# Altium PCB PCB_ADC.PcbDoc
Units mm, origin at the board's own origin, x right, y up, seen from the top; angles counter-clockwise.
Board outline 50.55 x 47.88 mm, 2 copper layers (Top Layer, Bottom Layer); 20 components, 14 nets, 52 pads, 8 vias.
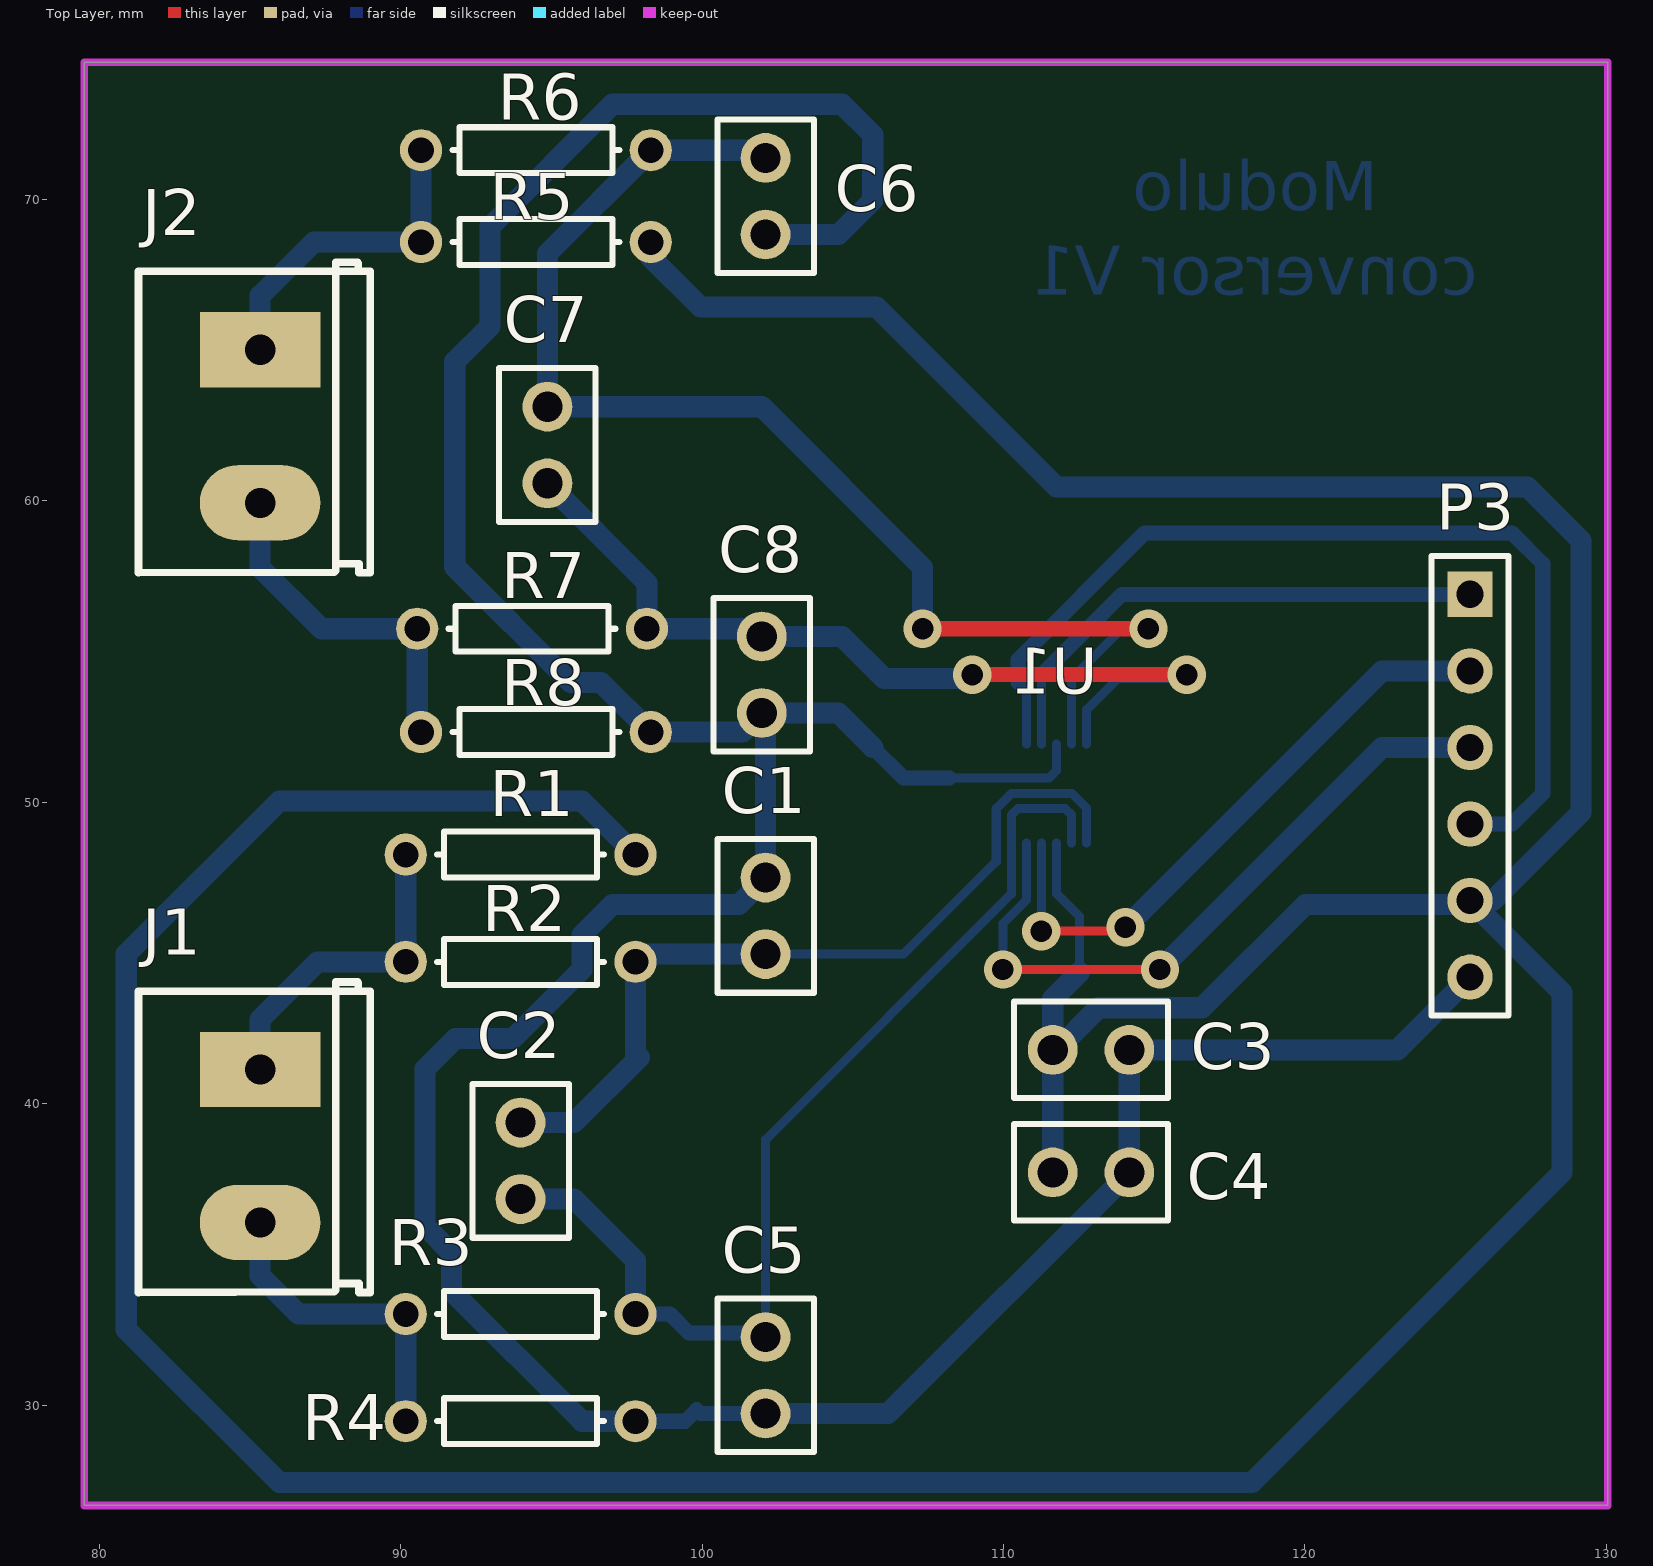
[diagram p0: Top Layer view]
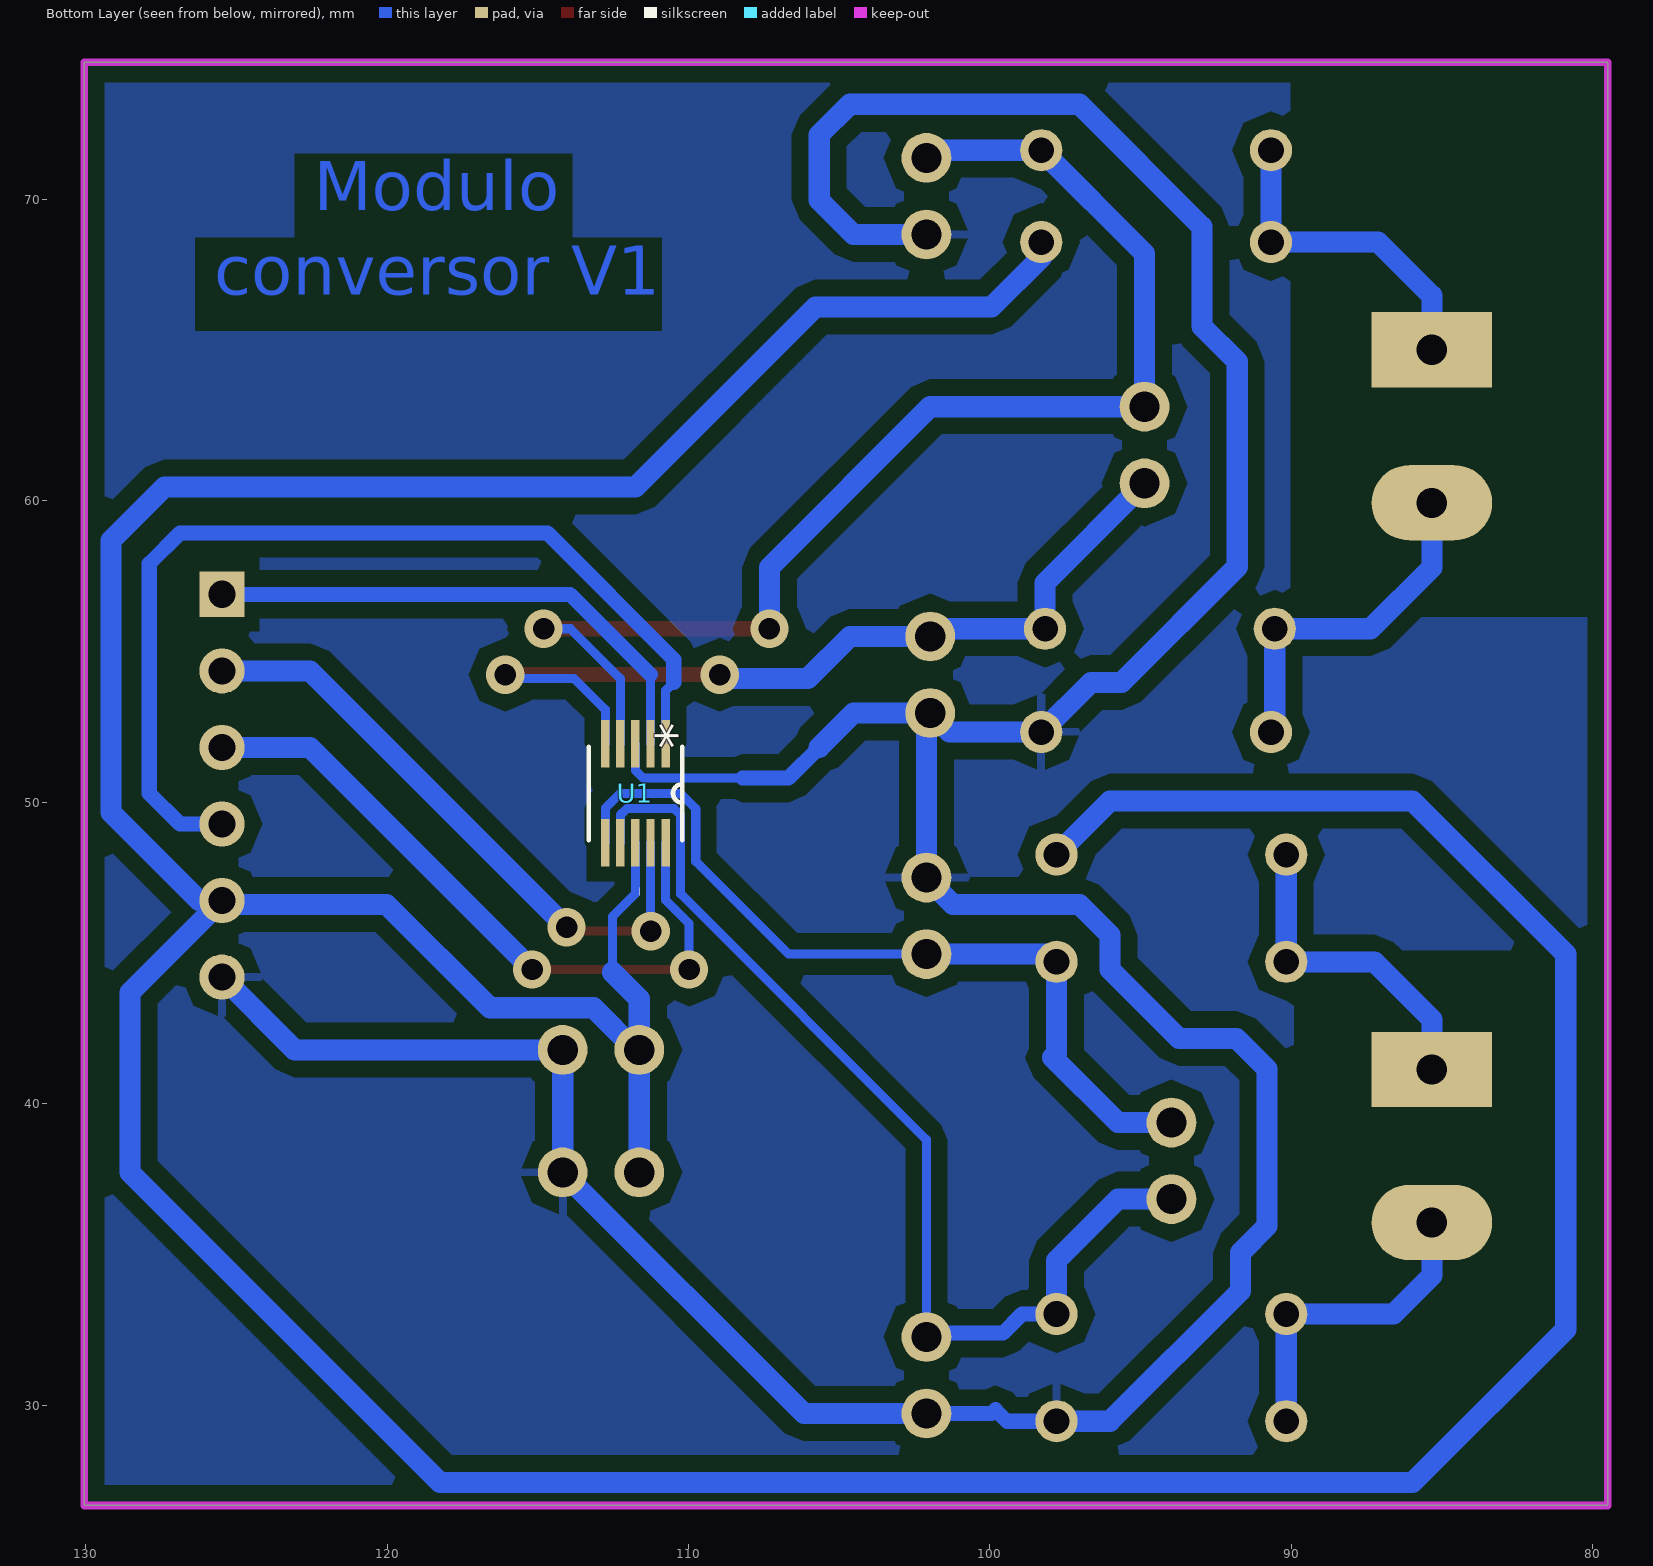
[diagram p1: Bottom Layer view, seen from below]

## Layer stack, top to bottom
Top Layer: signal copper 0.0356
Dielectric: dielectric 0.32, FR-4, Dk 4.8
Bottom Layer: signal copper 0.0356

## Board outline
79.502,26.67 79.502,74.549 130.048,74.549 130.048,26.67

## Design rules (kind name [scope] priority, off if disabled: settings)
Clearance [All] p1: gap=0.5
PlaneClearance [All] p1: clearance=0.7
PlaneConnect PlaneConnect_1 [All] p1: planeconnectstyle=Relief reliefexpansion=0.508 reliefentries=4 reliefconductorwidth=0.4 reliefairgap=0.254
PolygonConnect [All] p1: connectstyle=Relief reliefconductorwidth=0.254 reliefentries=4 polygonreliefangle="90 Angle"
RoomDefinition EsquematicoAD [InComponentClass('EsquematicoAD')] p1: confinementstyle=ConfineIn formatcopy=TRUE lockcomponents=FALSE outline 178.943,24.384 290.83,24.384 290.83,42.672 178.943,42.672
RoutingVias [All] p1: holewidth=0.711 width=1.27 viastyle="Through Hole" minholewidth=0.711 minwidth=1.27 maxholewidth=0.711 maxwidth=1.27
SMDNeckDown [All] p1: percent=100.000
SilkscreenOverComponentPads [All] p1: minsilkscreentomaskgap=0.254
SolderMaskExpansion [All] p1: expansion=0.102
Width [All] p1: maxlimit=0.7 minlimit=0.3 preferedwidth=0.4 toplayer_maxwidth=0.5 minimp=50.000000 maximp=50.000000 favimp=50.000000
25 further rules are at their usual default settings.

## Components (designator, comment, footprint, x,y, rotation, side; value= is the part's Value field where it differs from the comment)
C1 "Cap" CAPR2.54-5.1x3.2 102.108,46.228 r90 top
C2 "Cap" CAPR2.54-5.1x3.2 93.98,38.1 r90 top
C3 "Cap" CAPR2.54-5.1x3.2 112.903,41.783 r180 top
C4 "Cap" CAPR2.54-5.1x3.2 112.903,37.719 r180 top
C5 "Cap" CAPR2.54-5.1x3.2 102.108,30.988 r90 top
C6 "Cap" CAPR2.54-5.1x3.2 102.108,70.104 r270 top
C7 "Cap" CAPR2.54-5.1x3.2 94.869,61.849 r90 top
C8 "Cap" CAPR2.54-5.1x3.2 101.981,54.229 r90 top
J1 "BORNERA 2" "BORNERA 2" 85.344,38.608 r270 top
J2 "BORNERA 2" "BORNERA 2" 85.344,62.484 r270 top
P3 "Header 6" HDR1X6 125.476,56.896 r270 top
R1 "Res1" AXIAL-0.3 93.98,48.26 r0 top
R2 "Res1" AXIAL-0.3 93.98,44.704 r180 top
R3 "Res1" AXIAL-0.3 93.98,33.02 r180 top
R4 "Res1" AXIAL-0.3 93.98,29.464 r0 top
R5 "Res1" AXIAL-0.3 94.488,68.58 r0 top
R6 "Res1" AXIAL-0.3 94.488,71.628 r180 top
R7 "Res1" AXIAL-0.3 94.361,55.753 r180 top
R8 "Res1" AXIAL-0.3 94.488,52.324 r0 top
U1 "ADS1118_DGS_10" DGS10 111.76,50.292 r270 bottom

## Footprints (in the part's own frame and the unit in brackets; to place one, negate y for a bottom-side part, rotate by r counter-clockwise, add the part's x,y. Pads: shape width x height; smd on the part's side, far side on the other; paste and mask are expansions set on the pad)
AXIAL-0.3 [mm] "Axial Device, Thru-Hole; 2 Leads; 0.3 in Pin Spacing"
  round 1.4 hole 0.85: 1(-3.81,0) 2(3.81,0)
  silkscreen extent -2.77,-0.76 2.77,0.76
"BORNERA 2" [mm]
  rect 2.5x4 hole 1: 1(-2.526,-0.003)
  oval 2.5x4 hole 1: 2(2.554,-0.003)
  silkscreen extent -5.43,-4.04 4.87,3.65, body extent -5.53,-3.94 4.97,3.76, height 10
CAPR2.54-5.1x3.2 [mm] "Capacitor, Ceramic, Thru-Hole, Dipped Radial; Body 5.1 x 3.2 mm (WxT) Pin Spacing 2.54 mm (typ)"
  round 1.65 hole 1: 1(-1.27,0) 2(1.27,0)
  silkscreen extent -2.55,-1.6 2.55,1.6
DGS10 [mil]
  rect 62x11 smd: 1(-64.76,39.37) 2(-64.76,19.68) 3(-64.76,0) 4(-64.76,-19.69) 5(-64.76,-39.37) 6(64.57,-39.37) 7(64.57,-19.69) 8(64.57,0) 9(64.57,19.68) 10(64.57,39.37)
  silkscreen extent -61,-61 133,61, body extent -61,-61 61,61, height 59
HDR1X6 [mm] "Connector; Header; 6 Position"
  rect 1.5x1.5 hole 0.9: 1(0,0)
  round 1.5 hole 0.9: 2(2.54,0) 3(5.08,0) 4(7.62,0) 5(10.16,0) 6(12.7,0)
  silkscreen extent -1.27,-1.27 13.97,1.27

## Part data
C1 C2 C3 C4 C5 C6 C7 C8: "Capacitor"
P3: "Header, 6-Pin"
R1 R2 R3 R4 R5 R6 R7 R8: "Resistor"
U1: "Imported"

## Via types
v1: diameter 1.27, hole 0.711, Top Layer to Bottom Layer, 8 vias

## Nets (pads, with @x,y where several pads share a name; then routed paths per layer and width w, separated by ;. In a path a pad name is that pad's centre, name@x,y a point inside that pad or via, vN(x,y) a via of type N, cw(c..) or ccw(c..) an arc to the next point about the centre after c; other vN are vias at no path point)
GND: C1.2 C3.1 C4.1 C5.1 C6.2 C8.1 P3.6 R4.2 R8.2 U1.3 | length 129.1
  Bottom Layer w0.3: 108.204,50.8 111.506,50.8 111.76,51.054 U1.3
  Bottom Layer w0.5: R4.2 99.441,29.464 99.822,29.845 99.949,29.718 C5.1 ; 105.664,51.816 106.68,50.8 108.204,50.8
  Bottom Layer w0.7: R4.2 96.012,29.464 91.694,33.782 91.694,35.052 90.805,35.941 90.805,41.148 91.821,42.164 93.726,42.164 96.012,44.45 96.012,45.593 97.028,46.609 101.219,46.609 C1.2 102.108,52.832 C8.1 ; C5.1 106.172,29.718 C4.1 C3.1 123.063,41.783 P3.6 ; C6.2 104.521,68.834 105.664,69.977 105.664,72.136 104.648,73.152 97.028,73.152 92.964,69.088 92.964,65.786 91.795,64.617 91.795,57.811 95.631,53.975 96.647,53.975 R8.2 101.346,52.324 C8.1 ; 105.664,51.816 104.521,52.959 C8.1
NetC1_1: C1.1 C2.2 R2.1 U1.6 | length 27.7
  Bottom Layer w0.3: C1.1 106.68,44.958 109.76,48.038 109.76,49.781 110.268,50.289 112.271,50.289 112.76,49.8 U1.6
  Bottom Layer w0.7: C2.2 95.758,39.37 97.917,41.529 97.79,41.656 R2.1 98.044,44.958 C1.1
NetC2_1: C2.1 C5.2 R3.1 U1.7 | length 34.9
  Bottom Layer w0.3: C5.2 102.108,38.807 110.26,46.959 110.26,49.574 110.475,49.789 112.045,49.789 112.26,49.574 U1.7
  Bottom Layer w0.5: R3.1 98.933,33.02 99.568,32.385 101.981,32.385 C5.2
  Bottom Layer w0.7: C2.1 95.758,36.83 97.79,34.798 R3.1
NetC6_1: C6.1 C7.2 R6.1 U1.4 | length 43.4
  Top Layer w0.5: v1(107.315,55.753) v1(114.808,55.753)
  Bottom Layer w0.3: U1.4 112.26,54.094 113.919,55.753 v1(114.808,55.753)
  Bottom Layer w0.7: C6.1 101.854,71.628 R6.1 94.869,68.199 C7.2 101.981,63.119 107.315,57.785 v1(107.315,55.753)
NetC7_1: C7.1 C8.2 R7.1 U1.5 | length 29.9
  Top Layer w0.5: v1(108.966,54.229) v1(116.078,54.229)
  Bottom Layer w0.3: U1.5 112.76,53.07 113.792,54.102 115.697,54.102 115.951,54.356 v1(116.078,54.229)
  Bottom Layer w0.7: C7.1 98.171,57.277 R7.1 101.727,55.753 C8.2 104.648,55.499 106.045,54.102 108.839,54.102 v1(108.966,54.229)
NetP3_1: P3.1 U1.2 | length 17.6
  Bottom Layer w0.3: U1.2 111.26,54.229
  Bottom Layer w0.5: 111.26,54.229 113.927,56.896 P3.1
NetP3_2: P3.2 U1.9 | length 20.8
  Top Layer w0.3: v1(111.252,45.72) 113.919,45.72 v1(114.046,45.847)
  Bottom Layer w0.3: v1(111.252,45.72) 111.379,45.847 111.26,45.966 111.26,47.244 U1.9
  Bottom Layer w0.7: v1(114.046,45.847) 122.555,54.356 P3.2
NetP3_3: P3.3 U1.10 | length 23.1
  Top Layer w0.3: v1(109.982,44.45) v1(115.189,44.45)
  Bottom Layer w0.3: v1(109.982,44.45) 109.982,45.974 110.76,46.752 U1.10
  Bottom Layer w0.7: v1(115.189,44.45) 122.555,51.816 P3.3
NetP3_4: P3.4 U1.1 | length 32.9
  Bottom Layer w0.3: 110.49,53.975 110.76,53.705 U1.1
  Bottom Layer w0.5: 110.49,53.975 110.49,54.737 114.681,58.928 126.873,58.928 127.889,57.912 127.889,50.292 126.873,49.276 P3.4
P1+: J1.1 R1.1 R2.2 | length 10.8
  Bottom Layer w0.7: J1.1 85.341,42.796 87.249,44.704 R2.2 R1.1
P1-: J1.2 R3.2 R4.1 | length 10.7
  Bottom Layer w0.7: J1.2 85.341,34.293 86.614,33.02 R3.2 R4.1
P2+: J2.1 R5.1 R6.2 | length 11.1
  Bottom Layer w0.7: J2.1 85.341,66.799 87.122,68.58 R5.1 ; R5.1@90.551,68.453 R5.1 ; R6.2 R5.1
P2-: J2.2 R7.2 R8.1 | length 11.7
  Bottom Layer w0.7: J2.2 85.341,57.788 87.376,55.753 R7.2 90.551,52.451 R8.1
VCC: C3.2 C4.2 P3.5 R1.2 R5.2 U1.8 | length 173.3
  Bottom Layer w0.3: C3.2 C3.2@111.76,41.91 ; U1.8 111.76,46.967 112.522,46.205 112.522,44.358
  Bottom Layer w0.7: R1.2 96.012,50.038 85.979,50.038 80.899,44.958 80.899,32.512 85.979,27.432 118.237,27.432 128.524,37.719 128.524,43.688 P3.5 126.238,46.736 129.159,49.657 129.159,58.674 127.381,60.452 111.76,60.452 105.791,66.421 99.949,66.421 98.298,68.072 R5.2 ; C4.2 C3.2 ; 112.522,44.358 111.633,43.469 C3.2 ; P3.5@125.476,46.609 120.015,46.609 116.586,43.18 113.157,43.18 111.76,41.783 C3.2

## Polygon pours and split planes (outlines as drawn)
GND on Bottom Layer "Top Layer-No Net" (solid, pour order 1000): 90.043,74.549 90.043,56.388 89.789,56.134 79.502,56.134 79.502,45.085 89.916,45.085 89.916,26.67 130.048,26.67 130.048,74.295 129.794,74.549 90.043,74.549

## Keep-outs
Keep-Out Layer:
  the board outline again, w0.254

## Other copper
Bottom Layer:
  text "Modulo" at 122.428,69.088 h2.8
  text "conversor V1" at 125.73,66.294 h2.8

## Text inside footprints (layer, text, board x,y; h text height)
U1: Bottom Overlay "*" at 111.633,52.629 h1.27 r90; Mechanical 1 "*" at 111.633,52.629 h1.27 r90